# EAGLE board Weight-X - PCB (EAGLE 7.6.0), part 1 of 2
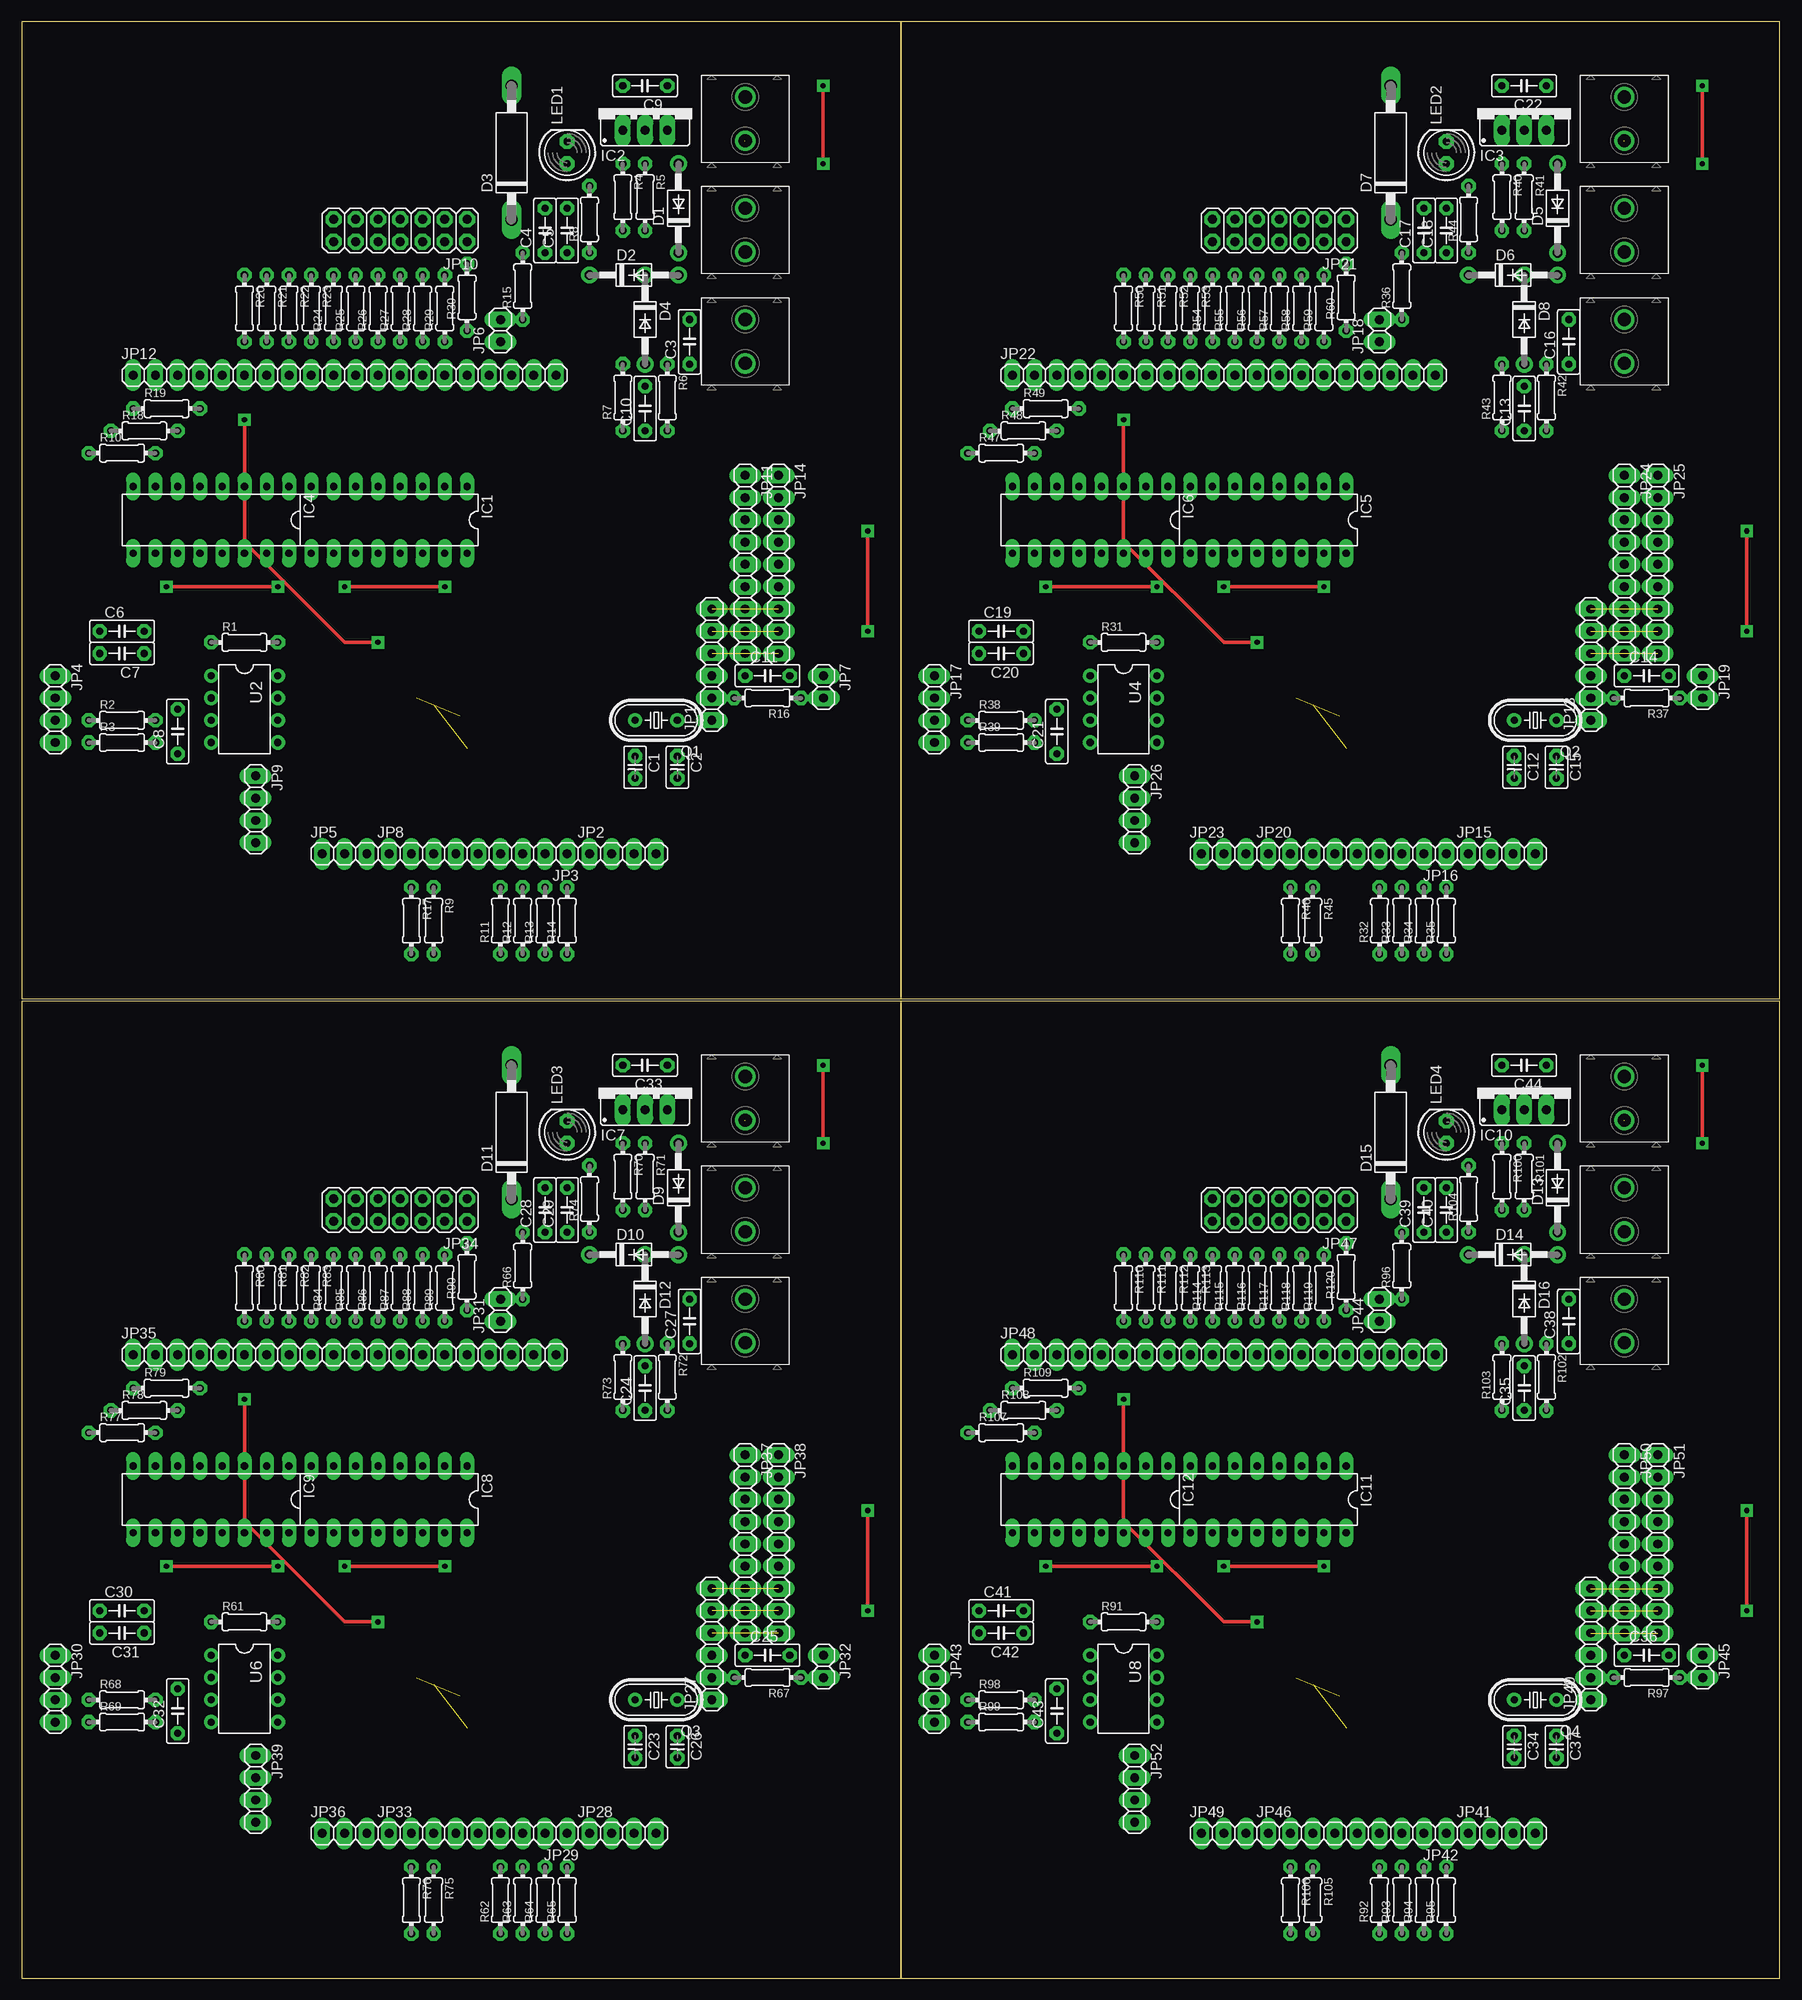
[diagram p0: board, top side]
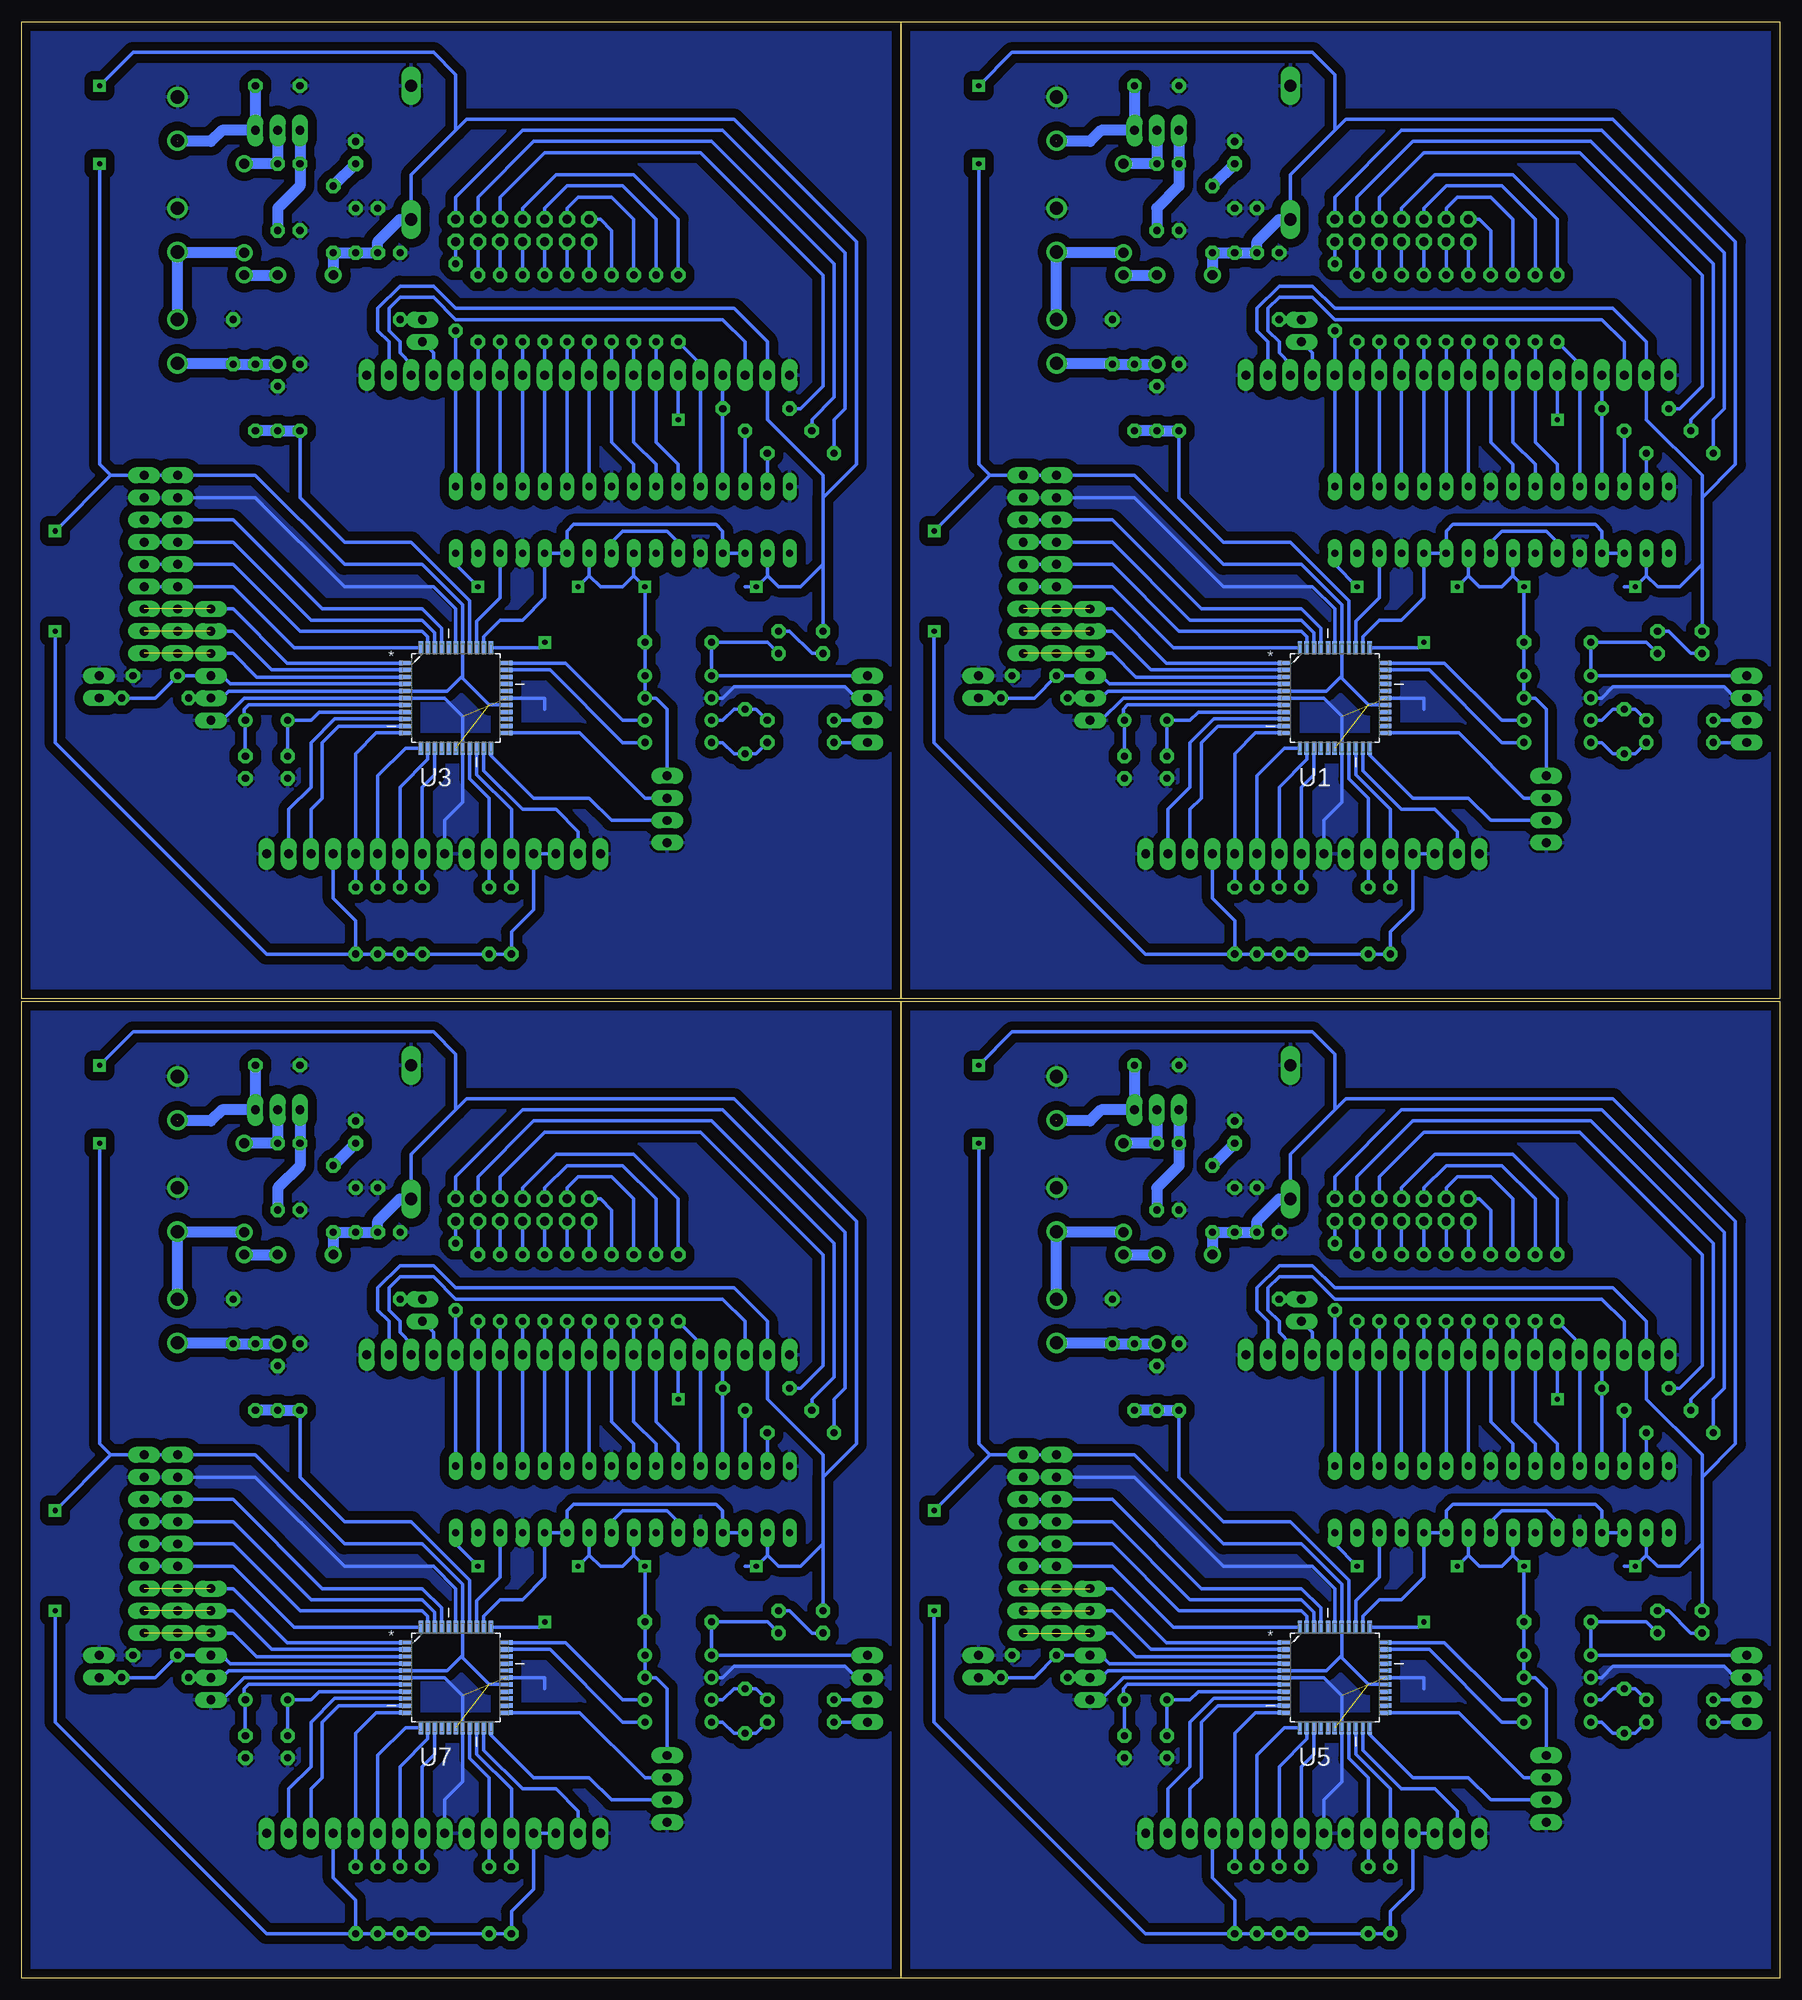
[diagram p1: board, bottom side, seen from below]

Size 200.64 x 223.19 mm. Coordinates in mm from the lower left corner, seen from the top.
Outline: 0,111.76 100.31,111.76 100.31,223.19 0,223.19 0,111.76
Outline: 100.33,111.76 200.64,111.76 200.64,223.19 100.33,223.19 100.33,111.76
Outline: 0,0 100.31,0 100.31,111.43 0,111.43 0,0
Outline: 100.33,0 200.64,0 200.64,111.43 100.33,111.43 100.33,0
Copper layers (1*16): Top 0.035mm / dielectric 1.5mm / Bottom 0.035mm
Design rules "default *": minimum track width 10mil, minimum drill 24mil, track to track 8mil, track to pad 8mil, pad to pad 8mil, via to via 8mil, smd to smd 8mil, copper to edge 40mil, drill to drill 8mil, minimum pad ring 16mil, minimum via ring 16mil, stop-mask expansion 4mil, vias tented up to drill 0mil, thermal gap 10mil
Net classes: 0 GND: clearance 1 mm

## Footprints (pad centres in the part's own frame; a part is rotated, then mirrored left to right if it is on the bottom)
EK500V-02P = drill 1.5: P$1 0,0; P$2 5,0
C2.5-2 = drill 0.813 pad 1.6 octagon: 1 -1.27,0; 2 1.27,0
C5B2.5 = drill 0.813 pad 1.6 octagon: 1 -2.54,0; 2 2.54,0
DO41-10 = drill 1.118 pad 1.93: A 5.08,0; C -5.08,0
DO41-10' = drill 1.118: A 5.08,0; C -5.08,0
C1702-15 = drill 1.397 long: A 7.62,0; C -7.62,0
DIL16 = drill 0.813 long: 1 -8.89,-3.81; 2 -6.35,-3.81; 3 -3.81,-3.81; 4 -1.27,-3.81; 5 1.27,-3.81; 6 3.81,-3.81; 7 6.35,-3.81; 8 8.89,-3.81; 9 8.89,3.81; 10 6.35,3.81; 11 3.81,3.81; 12 1.27,3.81; 13 -1.27,3.81; 14 -3.81,3.81; 15 -6.35,3.81; 16 -8.89,3.81
317TS = drill 1.016 long: 1 -2.54,-2.54; 2 0,-2.54; 3 2.54,-2.54
1X06 = drill 1.016 long: 1 -6.35,0; 2 -3.81,0; 3 -1.27,0; 4 1.27,0; 5 3.81,0; 6 6.35,0
1X04 = drill 1.016 long: 1 -3.81,0; 2 -1.27,0; 3 1.27,0; 4 3.81,0
1X05 = drill 1.016 long: 1 -5.08,0; 2 -2.54,0; 3 0,0; 4 2.54,0; 5 5.08,0
1X03 = drill 1.016 long: 1 -2.54,0; 2 0,0; 3 2.54,0
1X02 = drill 1.016 long: 1 -1.27,0; 2 1.27,0
2X07 = drill 1.016 octagon: 1 -7.62,-1.27; 2 -7.62,1.27; 3 -5.08,-1.27; 4 -5.08,1.27; 5 -2.54,-1.27; 6 -2.54,1.27; 7 0,-1.27; 8 0,1.27; 9 2.54,-1.27; 10 2.54,1.27; 11 5.08,-1.27; 12 5.08,1.27; 13 7.62,-1.27; 14 7.62,1.27
1X09 = drill 1.016 long: 1 -10.16,0; 2 -7.62,0; 3 -5.08,0; 4 -2.54,0; 5 0,0; 6 2.54,0; 7 5.08,0; 8 7.62,0; 9 10.16,0
1X20 = drill 1.016 long: 1 -24.13,0; 2 -21.59,0; 3 -19.05,0; 4 -16.51,0; 5 -13.97,0; 6 -11.43,0; 7 -8.89,0; 8 -6.35,0; 9 -3.81,0; 10 -1.27,0; 11 1.27,0; 12 3.81,0; 13 6.35,0; 14 8.89,0; 15 11.43,0; 16 13.97,0; 17 16.51,0; 18 19.05,0; 19 21.59,0; 20 24.13,0
LED5MM = drill 0.813 pad 1.676 octagon: A -1.27,0; K 1.27,0
HC49U-V = drill 0.813: 1 -2.413,0; 2 2.413,0
0204/7 = drill 0.813 octagon: 1 -3.81,0; 2 3.81,0
QFP80P1200X1200X120-44N = smd 1.473 x 0.508: 1 -5.74,3.988; 2 -5.74,3.2; 3 -5.74,2.388; 4 -5.74,1.6; 5 -5.74,0.787; 6 -5.74,0; 7 -5.74,-0.787; 8 -5.74,-1.6; 9 -5.74,-2.388; 10 -5.74,-3.2; 11 -5.74,-3.988; 23 5.74,-3.988; 24 5.74,-3.2; 25 5.74,-2.388; 26 5.74,-1.6; 27 5.74,-0.787; 28 5.74,0; 29 5.74,0.787; 30 5.74,1.6; 31 5.74,2.388; 32 5.74,3.2; 33 5.74,3.988 | smd 0.508 x 1.473: 12 -3.988,-5.74; 13 -3.2,-5.74; 14 -2.388,-5.74; 15 -1.6,-5.74; 16 -0.787,-5.74; 17 0,-5.74; 18 0.787,-5.74; 19 1.6,-5.74; 20 2.388,-5.74; 21 3.2,-5.74; 22 3.988,-5.74; 34 3.988,5.74; 35 3.2,5.74; 36 2.388,5.74; 37 1.6,5.74; 38 0.787,5.74; 39 0,5.74; 40 -0.787,5.74; 41 -1.6,5.74; 42 -2.388,5.74; 43 -3.2,5.74; 44 -3.988,5.74
PDIP08_300MIL = drill 0.813: AGND -1.27,-3.81; AVDD -3.81,3.81; DOUT 1.27,3.81; DVDD -1.27,3.81; INN 1.27,-3.81; INP 3.81,-3.81; PD_SCK 3.81,3.81; VREF -3.81,-3.81

## Placement (x,y rotation side)
BATTERY  ST02-5MM  [EK500V-02P]  82.55,201.93 270 top
BATTERY1  ST02-5MM  [EK500V-02P]  182.88,201.93 270 top
BATTERY2  ST02-5MM  [EK500V-02P]  82.55,90.17 270 top
BATTERY3  ST02-5MM  [EK500V-02P]  182.88,90.17 270 top
C1  22pF  [C2.5-2]  69.98,138.15 270 top
C2  22pF  [C2.5-2]  74.8,138.15 270 top
C3  0.1uF  [C5B2.5]  76.2,186.69 90 top
C4  1uF  [C5B2.5]  59.69,199.39 90 top
C5  0.1uF  [C5B2.5]  62.23,199.39 90 top
C6  1uF  [C5B2.5]  11.43,153.67 0 top
C7  0.1uF  [C5B2.5]  11.43,151.13 180 top
C8  0.1uF  [C5B2.5]  17.78,142.24 90 top
C9  0.1uF  [C5B2.5]  71.12,215.9 180 top
C10  1uF  [C5B2.5]  71.12,179.07 90 top
C11  0.1uF  [C5B2.5]  85.09,148.59 0 top
C12  22pF  [C2.5-2]  170.31,138.15 270 top
C13  1uF  [C5B2.5]  171.45,179.07 90 top
C14  0.1uF  [C5B2.5]  185.42,148.59 0 top
C15  22pF  [C2.5-2]  175.13,138.15 270 top
C16  0.1uF  [C5B2.5]  176.53,186.69 90 top
C17  1uF  [C5B2.5]  160.02,199.39 90 top
C18  0.1uF  [C5B2.5]  162.56,199.39 90 top
C19  1uF  [C5B2.5]  111.76,153.67 0 top
C20  0.1uF  [C5B2.5]  111.76,151.13 180 top
C21  0.1uF  [C5B2.5]  118.11,142.24 90 top
C22  0.1uF  [C5B2.5]  171.45,215.9 180 top
C23  22pF  [C2.5-2]  69.98,26.39 270 top
C24  1uF  [C5B2.5]  71.12,67.31 90 top
C25  0.1uF  [C5B2.5]  85.09,36.83 0 top
C26  22pF  [C2.5-2]  74.8,26.39 270 top
C27  0.1uF  [C5B2.5]  76.2,74.93 90 top
C28  1uF  [C5B2.5]  59.69,87.63 90 top
C29  0.1uF  [C5B2.5]  62.23,87.63 90 top
C30  1uF  [C5B2.5]  11.43,41.91 0 top
C31  0.1uF  [C5B2.5]  11.43,39.37 180 top
C32  0.1uF  [C5B2.5]  17.78,30.48 90 top
C33  0.1uF  [C5B2.5]  71.12,104.14 180 top
C34  22pF  [C2.5-2]  170.31,26.39 270 top
C35  1uF  [C5B2.5]  171.45,67.31 90 top
C36  0.1uF  [C5B2.5]  185.42,36.83 0 top
C37  22pF  [C2.5-2]  175.13,26.39 270 top
C38  0.1uF  [C5B2.5]  176.53,74.93 90 top
C39  1uF  [C5B2.5]  160.02,87.63 90 top
C40  0.1uF  [C5B2.5]  162.56,87.63 90 top
C41  1uF  [C5B2.5]  111.76,41.91 0 top
C42  0.1uF  [C5B2.5]  111.76,39.37 180 top
C43  0.1uF  [C5B2.5]  118.11,30.48 90 top
C44  0.1uF  [C5B2.5]  171.45,104.14 180 top
D1  1N4004  [DO41-10]  74.93,201.93 90 top
D2  1N4004  [DO41-10']  69.85,194.31 0 top
D3  [C1702-15]  55.88,208.28 90 top
D4  1N4004  [DO41-10']  71.12,189.23 270 top
D5  1N4004  [DO41-10]  175.26,201.93 90 top
D6  1N4004  [DO41-10']  170.18,194.31 0 top
D7  [C1702-15]  156.21,208.28 90 top
D8  1N4004  [DO41-10']  171.45,189.23 270 top
D9  1N4004  [DO41-10]  74.93,90.17 90 top
D10  1N4004  [DO41-10']  69.85,82.55 0 top
D11  [C1702-15]  55.88,96.52 90 top
D12  1N4004  [DO41-10']  71.12,77.47 270 top
D13  1N4004  [DO41-10]  175.26,90.17 90 top
D14  1N4004  [DO41-10']  170.18,82.55 0 top
D15  [C1702-15]  156.21,96.52 90 top
D16  1N4004  [DO41-10']  171.45,77.47 270 top
IC1  74LS595N  [DIL16]  41.91,166.37 180 top
IC2  [317TS]  71.12,213.36 0 top
IC3  [317TS]  171.45,213.36 0 top
IC4  74LS595N  [DIL16]  21.59,166.37 180 top
IC5  74LS595N  [DIL16]  142.24,166.37 180 top
IC6  74LS595N  [DIL16]  121.92,166.37 180 top
IC7  [317TS]  71.12,101.6 0 top
IC8  74LS595N  [DIL16]  41.91,54.61 180 top
IC9  74LS595N  [DIL16]  21.59,54.61 180 top
IC10  [317TS]  171.45,101.6 0 top
IC11  74LS595N  [DIL16]  142.24,54.61 180 top
IC12  74LS595N  [DIL16]  121.92,54.61 180 top
JP1  [1X06]  78.74,149.86 90 top
JP2  [1X04]  68.58,128.27 0 top
JP3  [1X05]  57.15,128.27 180 top
JP4  [1X04]  3.81,144.78 270 top
JP5  [1X03]  36.83,128.27 0 top
JP6  [1X02]  54.61,187.96 90 top
JP7  [1X02]  91.49,147.32 270 top
JP8  [1X04]  45.72,128.27 0 top
JP9  [1X04]  26.67,133.35 270 top
JP10  [2X07]  43.18,199.39 180 top
JP11  [1X09]  82.55,161.29 270 top
JP12  [1X20]  36.83,182.88 0 top
JP13  [1X06]  179.07,149.86 90 top
JP14  [1X09]  86.36,161.29 270 top
JP15  [1X04]  168.91,128.27 0 top
JP16  [1X05]  157.48,128.27 180 top
JP17  [1X04]  104.14,144.78 270 top
JP18  [1X02]  154.94,187.96 90 top
JP19  [1X02]  191.82,147.32 270 top
JP20  [1X04]  146.05,128.27 0 top
JP21  [2X07]  143.51,199.39 180 top
JP22  [1X20]  137.16,182.88 0 top
JP23  [1X03]  137.16,128.27 0 top
JP24  [1X09]  182.88,161.29 270 top
JP25  [1X09]  186.69,161.29 270 top
JP26  [1X04]  127,133.35 270 top
JP27  [1X06]  78.74,38.1 90 top
JP28  [1X04]  68.58,16.51 0 top
JP29  [1X05]  57.15,16.51 180 top
JP30  [1X04]  3.81,33.02 270 top
JP31  [1X02]  54.61,76.2 90 top
JP32  [1X02]  91.49,35.56 270 top
JP33  [1X04]  45.72,16.51 0 top
JP34  [2X07]  43.18,87.63 180 top
JP35  [1X20]  36.83,71.12 0 top
JP36  [1X03]  36.83,16.51 0 top
JP37  [1X09]  82.55,49.53 270 top
JP38  [1X09]  86.36,49.53 270 top
JP39  [1X04]  26.67,21.59 270 top
JP40  [1X06]  179.07,38.1 90 top
JP41  [1X04]  168.91,16.51 0 top
JP42  [1X05]  157.48,16.51 180 top
JP43  [1X04]  104.14,33.02 270 top
JP44  [1X02]  154.94,76.2 90 top
JP45  [1X02]  191.82,35.56 270 top
JP46  [1X04]  146.05,16.51 0 top
JP47  [2X07]  143.51,87.63 180 top
JP48  [1X20]  137.16,71.12 0 top
JP49  [1X03]  137.16,16.51 0 top
JP50  [1X09]  182.88,49.53 270 top
JP51  [1X09]  186.69,49.53 270 top
JP52  [1X04]  127,21.59 270 top
LED1  [LED5MM]  62.23,208.28 90 top
LED2  [LED5MM]  162.56,208.28 90 top
LED3  [LED5MM]  62.23,96.52 90 top
LED4  [LED5MM]  162.56,96.52 90 top
Q1  [HC49U-V]  72.39,143.51 180 top
Q2  [HC49U-V]  172.72,143.51 180 top
Q3  [HC49U-V]  72.39,31.75 180 top
Q4  [HC49U-V]  172.72,31.75 180 top
R1  220Ohms  [0204/7]  25.4,152.4 0 top
R2  220Ohms  [0204/7]  11.43,143.51 0 top
R3  220Ohms  [0204/7]  11.43,140.97 0 top
R4  1k  [0204/7]  68.58,203.2 270 top
R5  220Ohms  [0204/7]  71.12,203.2 270 top
R6  1M  [0204/7]  73.66,180.34 270 top
R7  100k  [0204/7]  68.58,180.34 90 top
R8  10k  [0204/7]  64.77,200.66 90 top
R9  4.7k  [0204/7]  46.99,120.65 270 top
R10  4.7k  [0204/7]  11.43,173.99 0 top
R11  10k  [0204/7]  54.61,120.65 90 top
R12  10k  [0204/7]  57.15,120.65 90 top
R13  10k  [0204/7]  59.69,120.65 90 top
R14  10k  [0204/7]  62.23,120.65 90 top
R15  4.7k  [0204/7]  57.15,193.04 90 top
R16  4.7k  [0204/7]  85.09,146.05 180 top
R17  4.7k  [0204/7]  44.45,120.65 270 top
R18  4.7k  [0204/7]  13.97,176.53 0 top
R19  4.7k  [0204/7]  16.51,179.07 0 top
R20  4.7k  [0204/7]  25.4,190.5 270 top
R21  4.7k  [0204/7]  27.94,190.5 270 top
R22  4.7k  [0204/7]  30.48,190.5 270 top
R23  4.7k  [0204/7]  33.02,190.5 270 top
R24  4.7k  [0204/7]  35.56,190.5 90 top
R25  4.7k  [0204/7]  38.1,190.5 90 top
R26  4.7k  [0204/7]  40.64,190.5 90 top
R27  4.7k  [0204/7]  43.18,190.5 90 top
R28  4.7k  [0204/7]  45.72,190.5 90 top
R29  4.7k  [0204/7]  48.26,190.5 90 top
R30  4.7k  [0204/7]  50.8,191.77 90 top
R31  220Ohms  [0204/7]  125.73,152.4 0 top
R32  10k  [0204/7]  154.94,120.65 90 top
R33  10k  [0204/7]  157.48,120.65 90 top
R34  10k  [0204/7]  160.02,120.65 90 top
R35  10k  [0204/7]  162.56,120.65 90 top
R36  4.7k  [0204/7]  157.48,193.04 90 top
R37  4.7k  [0204/7]  185.42,146.05 180 top
R38  220Ohms  [0204/7]  111.76,143.51 0 top
R39  220Ohms  [0204/7]  111.76,140.97 0 top
R40  1k  [0204/7]  168.91,203.2 270 top
R41  220Ohms  [0204/7]  171.45,203.2 270 top
R42  1M  [0204/7]  173.99,180.34 270 top
R43  100k  [0204/7]  168.91,180.34 90 top
R44  10k  [0204/7]  165.1,200.66 90 top
R45  4.7k  [0204/7]  147.32,120.65 270 top
R46  4.7k  [0204/7]  144.78,120.65 270 top
R47  4.7k  [0204/7]  111.76,173.99 0 top
R48  4.7k  [0204/7]  114.3,176.53 0 top
R49  4.7k  [0204/7]  116.84,179.07 0 top
R50  4.7k  [0204/7]  125.73,190.5 270 top
R51  4.7k  [0204/7]  128.27,190.5 270 top
R52  4.7k  [0204/7]  130.81,190.5 270 top
R53  4.7k  [0204/7]  133.35,190.5 270 top
R54  4.7k  [0204/7]  135.89,190.5 90 top
R55  4.7k  [0204/7]  138.43,190.5 90 top
R56  4.7k  [0204/7]  140.97,190.5 90 top
R57  4.7k  [0204/7]  143.51,190.5 90 top
R58  4.7k  [0204/7]  146.05,190.5 90 top
R59  4.7k  [0204/7]  148.59,190.5 90 top
R60  4.7k  [0204/7]  151.13,191.77 90 top
R61  220Ohms  [0204/7]  25.4,40.64 0 top
R62  10k  [0204/7]  54.61,8.89 90 top
R63  10k  [0204/7]  57.15,8.89 90 top
R64  10k  [0204/7]  59.69,8.89 90 top
R65  10k  [0204/7]  62.23,8.89 90 top
R66  4.7k  [0204/7]  57.15,81.28 90 top
R67  4.7k  [0204/7]  85.09,34.29 180 top
R68  220Ohms  [0204/7]  11.43,31.75 0 top
R69  220Ohms  [0204/7]  11.43,29.21 0 top
R70  1k  [0204/7]  68.58,91.44 270 top
R71  220Ohms  [0204/7]  71.12,91.44 270 top
R72  1M  [0204/7]  73.66,68.58 270 top
R73  100k  [0204/7]  68.58,68.58 90 top
R74  10k  [0204/7]  64.77,88.9 90 top
R75  4.7k  [0204/7]  46.99,8.89 270 top
R76  4.7k  [0204/7]  44.45,8.89 270 top
R77  4.7k  [0204/7]  11.43,62.23 0 top
R78  4.7k  [0204/7]  13.97,64.77 0 top
R79  4.7k  [0204/7]  16.51,67.31 0 top
R80  4.7k  [0204/7]  25.4,78.74 270 top
R81  4.7k  [0204/7]  27.94,78.74 270 top
R82  4.7k  [0204/7]  30.48,78.74 270 top
R83  4.7k  [0204/7]  33.02,78.74 270 top
R84  4.7k  [0204/7]  35.56,78.74 90 top
R85  4.7k  [0204/7]  38.1,78.74 90 top
R86  4.7k  [0204/7]  40.64,78.74 90 top
R87  4.7k  [0204/7]  43.18,78.74 90 top
R88  4.7k  [0204/7]  45.72,78.74 90 top
R89  4.7k  [0204/7]  48.26,78.74 90 top
R90  4.7k  [0204/7]  50.8,80.01 90 top
R91  220Ohms  [0204/7]  125.73,40.64 0 top
R92  10k  [0204/7]  154.94,8.89 90 top
R93  10k  [0204/7]  157.48,8.89 90 top
R94  10k  [0204/7]  160.02,8.89 90 top
R95  10k  [0204/7]  162.56,8.89 90 top
R96  4.7k  [0204/7]  157.48,81.28 90 top
R97  4.7k  [0204/7]  185.42,34.29 180 top
R98  220Ohms  [0204/7]  111.76,31.75 0 top
R99  220Ohms  [0204/7]  111.76,29.21 0 top
R100  1k  [0204/7]  168.91,91.44 270 top
R101  220Ohms  [0204/7]  171.45,91.44 270 top
R102  1M  [0204/7]  173.99,68.58 270 top
R103  100k  [0204/7]  168.91,68.58 90 top
R104  10k  [0204/7]  165.1,88.9 90 top
R105  4.7k  [0204/7]  147.32,8.89 270 top
R106  4.7k  [0204/7]  144.78,8.89 270 top
R107  4.7k  [0204/7]  111.76,62.23 0 top
R108  4.7k  [0204/7]  114.3,64.77 0 top
R109  4.7k  [0204/7]  116.84,67.31 0 top
R110  4.7k  [0204/7]  125.73,78.74 270 top
R111  4.7k  [0204/7]  128.27,78.74 270 top
R112  4.7k  [0204/7]  130.81,78.74 270 top
R113  4.7k  [0204/7]  133.35,78.74 270 top
R114  4.7k  [0204/7]  135.89,78.74 90 top
R115  4.7k  [0204/7]  138.43,78.74 90 top
R116  4.7k  [0204/7]  140.97,78.74 90 top
R117  4.7k  [0204/7]  143.51,78.74 90 top
R118  4.7k  [0204/7]  146.05,78.74 90 top
R119  4.7k  [0204/7]  148.59,78.74 90 top
R120  4.7k  [0204/7]  151.13,80.01 90 top
SMPS  ST02-5MM  [EK500V-02P]  82.55,214.63 270 top
SMPS1  ST02-5MM  [EK500V-02P]  182.88,214.63 270 top
SMPS2  ST02-5MM  [EK500V-02P]  82.55,102.87 270 top
SMPS3  ST02-5MM  [EK500V-02P]  182.88,102.87 270 top
SWITCH1  ST02-5MM  [EK500V-02P]  82.55,189.23 270 top
SWITCH2  ST02-5MM  [EK500V-02P]  182.88,189.23 270 top
SWITCH3  ST02-5MM  [EK500V-02P]  82.55,77.47 270 top
SWITCH4  ST02-5MM  [EK500V-02P]  182.88,77.47 270 top
U1  ATMEGA16A-AU  [QFP80P1200X1200X120-44N]  50.8,146.05 0 bottom
U2  HX710-P  [PDIP08_300MIL]  25.4,144.78 270 top
U3  ATMEGA16A-AU  [QFP80P1200X1200X120-44N]  151.13,146.05 0 bottom
U4  HX710-P  [PDIP08_300MIL]  125.73,144.78 270 top
U5  ATMEGA16A-AU  [QFP80P1200X1200X120-44N]  50.8,34.29 0 bottom
U6  HX710-P  [PDIP08_300MIL]  25.4,33.02 270 top
U7  ATMEGA16A-AU  [QFP80P1200X1200X120-44N]  151.13,34.29 0 bottom
U8  HX710-P  [PDIP08_300MIL]  125.73,33.02 270 top

## Library data of the parts
BATTERY BATTERY1-BATTERY3 SMPS SMPS1-SMPS3 SWITCH1-SWITCH4 = con-dinkle
C1-C44 = capacitor-wima
D1 D5 D9 D13 LED1-LED4 = adafruit
D2-D4 D6-D8 D10-D12 D14-D16 = diode
IC1 IC4-IC6 IC8 IC9 IC11 IC12 = 74xx-us
IC2 IC3 IC7 IC10 = v-reg
JP1-JP52 = pinhead
Q1-Q4 = adafruit; OC_FARNELL: 1666969; OC_NEWARK: unknown
R1-R120 = eagle-ltspice; SPICEMODEL: NONE; SPICEPREFIX: R
U1 U3 U5 U7 = Atmel_By_element14_Batch_1-00; MPN: ATMEGA16A-AU; OC_FARNELL: 1704560; OC_NEWARK: 08R5490; PACKAGE: TQFP-44; SUPPLIER: Atmel
U2 U4 U6 U8 = hx710

## Nets
1_DIGIT_ACT: JP10.1 R10.1
1_DIGIT_ACT1: JP21.1 R47.1
1_DIGIT_ACT2: JP34.1 R77.1
1_DIGIT_ACT3: JP47.1 R107.1
2_DIGIT_ACT: JP10.2 R30.2
2_DIGIT_ACT1: JP21.2 R60.2
2_DIGIT_ACT2: JP34.2 R90.2
2_DIGIT_ACT3: JP47.2 R120.2
3_DIGIT_ACT: JP10.3 R18.1
3_DIGIT_ACT1: JP21.3 R48.1
3_DIGIT_ACT2: JP34.3 R78.1
3_DIGIT_ACT3: JP47.3 R108.1
4_DIGIT_ACT: JP10.4 R29.2
4_DIGIT_ACT1: JP21.4 R59.2
4_DIGIT_ACT2: JP34.4 R89.2
4_DIGIT_ACT3: JP47.4 R119.2
5_DIGIT_ACT: JP10.5 R19.1
5_DIGIT_ACT1: JP21.5 R49.1
5_DIGIT_ACT2: JP34.5 R79.1
5_DIGIT_ACT3: JP47.5 R109.1
6_DIGIT_ACT: JP10.6 R28.2
6_DIGIT_ACT1: JP21.6 R58.2
6_DIGIT_ACT2: JP34.6 R88.2
6_DIGIT_ACT3: JP47.6 R118.2
A: JP10.14 R24.2
A1: JP21.14 R54.2
A2: JP34.14 R84.2
A3: JP47.14 R114.2
ACTIVATOR: JP5.2 U1.21
ACTIVATOR1: JP23.2 U3.21
ACTIVATOR2: JP36.2 U5.21
ACTIVATOR3: JP49.2 U7.21
AREF: U1.29
AREF1: U3.29
AREF2: U5.29
AREF3: U7.29
B: JP10.13 R23.1
B1: JP21.13 R53.1
B2: JP34.13 R83.1
B3: JP47.13 R113.1
BATTERY_VOLTAGE: C10.1 R6.2 R7.1 U1.37
BATTERY_VOLTAGE1: C13.1 R42.2 R43.1 U3.37
BATTERY_VOLTAGE2: C24.1 R72.2 R73.1 U5.37
BATTERY_VOLTAGE3: C35.1 R102.2 R103.1 U7.37
BUTTON1: JP16.3 R33.2 U3.13
BUTTON2: JP16.4 R32.2 U3.14
BUTTON3: JP3.3 R12.2 U1.13
BUTTON4: JP3.4 R11.2 U1.14
BUTTON5: JP29.3 R63.2 U5.13
BUTTON6: JP29.4 R62.2 U5.14
BUTTON7: JP42.3 R93.2 U7.13
BUTTON8: JP42.4 R92.2 U7.14
C: JP10.12 R25.2
C1: JP21.12 R55.2
C2: JP34.12 R85.2
C3: JP47.12 R115.2
C/D: IC4.5 JP12.4 R19.2
C/D1: IC6.5 JP22.4 R49.2
C/D2: IC9.5 JP35.4 R79.2
C/D3: IC12.5 JP48.4 R109.2
CE_MEMORY: JP11.3 JP14.3 U1.41
CE_MEMORY1: JP24.3 JP25.3 U3.41
CE_MEMORY2: JP37.3 JP38.3 U5.41
CE_MEMORY3: JP50.3 JP51.3 U7.41
CE_NRF: JP11.5 JP14.5 U1.43
CE_NRF1: JP24.5 JP25.5 U3.43
CE_NRF2: JP37.5 JP38.5 U5.43
CE_NRF3: JP50.5 JP51.5 U7.43
CLOCK_DISPLAY: IC1.11 IC1.12 IC4.11 IC4.12 U1.35
CLOCK_DISPLAY1: IC5.11 IC5.12 IC6.11 IC6.12 U3.35
CLOCK_DISPLAY2: IC8.11 IC8.12 IC9.11 IC9.12 U5.35
CLOCK_DISPLAY3: IC11.11 IC11.12 IC12.11 IC12.12 U7.35
CS1: IC1.2 JP12.15 R29.1
CS2: IC1.1 JP12.16 R30.1
CS3: IC5.2 JP22.15 R59.1
CS4: IC5.1 JP22.16 R60.1
CS5: IC8.2 JP35.15 R89.1
CS6: IC8.1 JP35.16 R90.1
CS7: IC11.2 JP48.15 R119.1
CS8: IC11.1 JP48.16 R120.1
CSN_NRF: JP11.6 JP14.6 U1.44
CSN_NRF1: JP24.6 JP25.6 U3.44
CSN_NRF2: JP37.6 JP38.6 U5.44
CSN_NRF3: JP50.6 JP51.6 U7.44
D: JP10.11 R22.1
D1: JP21.11 R52.1
D2: JP34.11 R82.1
D3: JP47.11 R112.1
DATA_DISPLAY: IC1.14 U1.36
DATA_DISPLAY1: IC5.14 U3.36
DATA_DISPLAY2: IC8.14 U5.36
DATA_DISPLAY3: IC11.14 U7.36
DB0: IC4.3 JP12.7 R21.2
DB1: IC4.2 JP12.8 R22.2
DB2: IC4.1 JP12.9 R23.2
DB3: IC1.7 JP12.10 R24.1
DB4: IC1.6 JP12.11 R25.1
DB5: IC1.5 JP12.12 R26.1
DB6: IC1.4 JP12.13 R27.1
DB7: IC1.3 JP12.14 R28.1
DB8: IC6.3 JP22.7 R51.2
DB9: IC6.2 JP22.8 R52.2
DB10: IC6.1 JP22.9 R53.2
DB11: IC5.7 JP22.10 R54.1
DB12: IC5.6 JP22.11 R55.1
DB13: IC5.5 JP22.12 R56.1
DB14: IC5.4 JP22.13 R57.1
DB15: IC5.3 JP22.14 R58.1
DB16: IC9.3 JP35.7 R81.2
DB17: IC9.2 JP35.8 R82.2
DB18: IC9.1 JP35.9 R83.2
DB19: IC8.7 JP35.10 R84.1
DB20: IC8.6 JP35.11 R85.1
DB21: IC8.5 JP35.12 R86.1
DB22: IC8.4 JP35.13 R87.1
DB23: IC8.3 JP35.14 R88.1
DB24: IC12.3 JP48.7 R111.2
DB25: IC12.2 JP48.8 R112.2
DB26: IC12.1 JP48.9 R113.2
DB27: IC11.7 JP48.10 R114.1
DB28: IC11.6 JP48.11 R115.1
DB29: IC11.5 JP48.12 R116.1
DB30: IC11.4 JP48.13 R117.1
DB31: IC11.3 JP48.14 R118.1
DOUT: U1.33 U2.DOUT
DOUT1: JP9.3 U1.22
DOUT2: U3.33 U4.DOUT
DOUT3: JP26.3 U3.22
DOUT4: U5.33 U6.DOUT
DOUT5: JP39.3 U5.22
DOUT6: U7.33 U8.DOUT
DOUT7: JP52.3 U7.22
DP: JP10.7 R20.1
DP1: JP21.7 R50.1
DP2: JP34.7 R80.1
DP3: JP47.7 R110.1
E: JP12.6 U1.34
E1: JP22.6 U3.34
E2: JP35.6 U5.34
E3: JP48.6 U7.34
E_LED: JP10.10 R26.2
E_LED1: JP21.10 R56.2
E_LED2: JP34.10 R86.2
E_LED3: JP47.10 R116.2
F: JP10.9 R21.1
F1: JP21.9 R51.1
F2: JP34.9 R81.1
F3: JP47.9 R111.1
G: JP10.8 R27.2
G1: JP21.8 R57.2
G2: JP34.8 R87.2
G3: JP47.8 R117.2
GND: BATTERY.P$1 C1.2 C2.2 C3.2 C4.2 C5.2 C9.2 C10.2 C11.2 D3.A IC1.8 IC1.13 IC4.8 IC4.13 JP1.1 JP2.4 JP3.5 JP4.2 JP5.1 JP7.1 JP8.4 JP9.4 JP11.2 JP12.1 JP12.20 JP14.2 LED1.K R4.2 R7.2 R15.2 SMPS.P$1 U1.6 U1.18 U1.28 U1.39 U2.AGND
GND1: BATTERY1.P$1 C12.2 C13.2 C14.2 C15.2 C16.2 C17.2 C18.2 C22.2 D7.A IC5.8 IC5.13 IC6.8 IC6.13 JP13.1 JP15.4 JP16.5 JP17.2 JP19.1 JP20.4 JP22.1 JP22.20 JP23.1 JP24.2 JP25.2 JP26.4 LED2.K R36.2 R40.2 R43.2 SMPS1.P$1 U3.6 U3.18 U3.28 U3.39 U4.AGND
GND2: BATTERY2.P$1 C23.2 C24.2 C25.2 C26.2 C27.2 C28.2 C29.2 C33.2 D11.A IC8.8 IC8.13 IC9.8 IC9.13 JP27.1 JP28.4 JP29.5 JP30.2 JP32.1 JP33.4 JP35.1 JP35.20 JP36.1 JP37.2 JP38.2 JP39.4 LED3.K R66.2 R70.2 R73.2 SMPS2.P$1 U5.6 U5.18 U5.28 U5.39 U6.AGND
GND3: BATTERY3.P$1 C34.2 C35.2 C36.2 C37.2 C38.2 C39.2 C40.2 C44.2 D15.A IC11.8 IC11.13 IC12.8 IC12.13 JP40.1 JP41.4 JP42.5 JP43.2 JP45.1 JP46.4 JP48.1 JP48.20 JP49.1 JP50.2 JP51.2 JP52.4 LED4.K R96.2 R100.2 R103.2 SMPS3.P$1 U7.6 U7.18 U7.28 U7.39 U8.AGND
INN: C8.2 R2.2 U2.INN
INN1: C21.2 R38.2 U4.INN
INN2: C32.2 R68.2 U6.INN
INN3: C43.2 R98.2 U8.INN
INP: C8.1 R3.2 U2.INP
INP1: C21.1 R39.2 U4.INP
INP2: C32.1 R69.2 U6.INP
INP3: C43.1 R99.2 U8.INP
INT0: JP3.1 R14.2 U1.11
INT1: JP3.2 R13.2 U1.12
INT2: JP11.4 JP14.4 U1.42
INT3: JP16.1 R35.2 U3.11
INT4: JP16.2 R34.2 U3.12
INT5: JP24.4 JP25.4 U3.42
INT6: JP29.1 R65.2 U5.11
INT7: JP29.2 R64.2 U5.12
INT8: JP37.4 JP38.4 U5.42
INT9: JP42.1 R95.2 U7.11
INT10: JP42.2 R94.2 U7.12
INT11: JP50.4 JP51.4 U7.42
MISO: JP1.5 JP11.8 JP14.8 U1.2
MISO1: JP13.5 JP24.8 JP25.8 U3.2
MISO2: JP27.5 JP37.8 JP38.8 U5.2
MISO3: JP40.5 JP50.8 JP51.8 U7.2
MOSI: JP1.6 JP11.7 JP14.7 U1.1
MOSI1: JP13.6 JP24.7 JP25.7 U3.1
MOSI2: JP27.6 JP37.7 JP38.7 U5.1
MOSI3: JP40.6 JP50.7 JP51.7 U7.1
N$1: BATTERY.P$2 D1.C SWITCH1.P$1
N$2: IC2.1 R4.1 R5.2
N$3: LED1.A R8.2
N$4: D1.A IC2.2 R5.1
N$5: JP4.3 R2.1
N$6: D2.A D4.C
N$7: C9.1 IC2.3 SMPS.P$2
N$8: C19.2 C20.2
N$9: C6.2 C7.2
N$10: C3.1 D4.A R6.1 SWITCH1.P$2
N$11: JP4.4 R3.1
N$12: JP17.3 R38.1
N$13: JP6.2 R15.1
N$14: JP17.4 R39.1
N$15: IC1.9 IC4.14
N$16: IC1.15
N$17: IC3.1 R40.1 R41.2
N$18: D5.A IC3.2 R41.1
N$19: C22.1 IC3.3 SMPS1.P$2
N$20: U1.24
N$21: U1.25
N$22: U1.26
N$23: C16.1 D8.A R42.1 SWITCH2.P$2
N$24: IC4.15
N$25: JP18.2 R36.1
N$26: BATTERY1.P$2 D5.C SWITCH2.P$1
N$27: LED2.A R44.2
N$28: D6.A D8.C
N$29: IC5.9 IC6.14
N$30: IC5.15
N$31: IC6.15
N$32: U3.24
N$33: U3.25
N$34: U3.26
N$35: C30.2 C31.2
N$36: JP30.3 R68.1
N$37: JP30.4 R69.1
N$38: IC7.1 R70.1 R71.2
N$39: D9.A IC7.2 R71.1
N$40: C33.1 IC7.3 SMPS2.P$2
N$41: C27.1 D12.A R72.1 SWITCH3.P$2
N$42: JP31.2 R66.1
N$43: BATTERY2.P$2 D9.C SWITCH3.P$1
N$44: LED3.A R74.2
N$45: D10.A D12.C
N$46: IC8.9 IC9.14
N$47: IC8.15
N$48: IC9.15
N$49: U5.24
N$50: U5.25
N$51: U5.26
N$52: C41.2 C42.2
N$53: JP43.3 R98.1
N$54: JP43.4 R99.1
N$55: IC10.1 R100.1 R101.2
N$56: D13.A IC10.2 R101.1
N$57: C44.1 IC10.3 SMPS3.P$2
N$58: C38.1 D16.A R102.1 SWITCH4.P$2
N$59: JP44.2 R96.1
N$60: BATTERY3.P$2 D13.C SWITCH4.P$1
N$61: LED4.A R104.2
N$62: D14.A D16.C
N$63: IC11.9 IC12.14
N$64: IC11.15
N$65: IC12.15
N$66: U7.24
N$67: U7.25
N$68: U7.26
PD_SCK: U1.32 U2.PD_SCK
PD_SCK1: JP9.2 U1.23
PD_SCK2: U3.32 U4.PD_SCK
PD_SCK3: JP26.2 U3.23
PD_SCK4: U5.32 U6.PD_SCK
PD_SCK5: JP39.2 U5.23
PD_SCK6: U7.32 U8.PD_SCK
PD_SCK7: JP52.2 U7.23
QG: IC4.6 R18.2
QG1: IC6.6 R48.2
QG2: IC9.6 R78.2
QG3: IC12.6 R108.2
QH: IC4.7 R10.2
QH1: IC6.7 R47.2
QH2: IC9.7 R77.2
QH3: IC12.7 R107.2
R/W: IC4.4 JP12.5 R20.2
R/W1: IC6.4 JP22.5 R50.2
R/W2: IC9.4 JP35.5 R80.2
R/W3: IC12.4 JP48.5 R110.2
RES: JP6.1 JP12.17
RES1: JP18.1 JP22.17
RES2: JP31.1 JP35.17
RES3: JP44.1 JP48.17
RESET: C11.1 JP1.3 JP7.2 R16.1 U1.4
RESET1: C14.1 JP13.3 JP19.2 R37.1 U3.4
RESET2: C25.1 JP27.3 JP32.2 R67.1 U5.4
RESET3: C36.1 JP40.3 JP45.2 R97.1 U7.4
RXD: JP2.3 U1.9
RXD1: JP15.3 U3.9
RXD2: JP28.3 U5.9
RXD3: JP41.3 U7.9
SCK: JP1.4 JP11.9 JP14.9 U1.3
SCK1: JP13.4 JP24.9 JP25.9 U3.3
SCK2: JP27.4 JP37.9 JP38.9 U5.3
SCK3: JP40.4 JP50.9 JP51.9 U7.3
SCL: JP8.3 R9.1 U1.19
SCL1: JP20.3 R45.1 U3.19
SCL2: JP33.3 R75.1 U5.19
SCL3: JP46.3 R105.1 U7.19
SDA: JP8.2 R17.1 U1.20
SDA1: JP20.2 R46.1 U3.20
SDA2: JP33.2 R76.1 U5.20
SDA3: JP46.2 R106.1 U7.20
TXD: JP2.2 U1.10
TXD1: JP15.2 U3.10
TXD2: JP28.2 U5.10
TXD3: JP41.2 U7.10
VCC: C4.1 C5.1 C6.1 D2.C D3.C IC1.10 IC1.16 IC4.10 IC4.16 JP1.2 JP2.1 JP5.3 JP8.1 JP9.1 JP11.1 JP12.2 JP12.19 JP14.1 R1.2 R8.1 R9.2 R11.1 R12.1 R13.1 R14.1 R16.2 R17.2 U1.5 U1.17 U1.27 U1.38 U2.AVDD U2.DVDD
VCC1: C17.1 C18.1 C19.1 D6.C D7.C IC5.10 IC5.16 IC6.10 IC6.16 JP13.2 JP15.1 JP20.1 JP22.2 JP22.19 JP23.3 JP24.1 JP25.1 JP26.1 R31.2 R32.1 R33.1 R34.1 R35.1 R37.2 R44.1 R45.2 R46.2 U3.5 U3.17 U3.27 U3.38 U4.AVDD U4.DVDD
VCC2: C28.1 C29.1 C30.1 D10.C D11.C IC8.10 IC8.16 IC9.10 IC9.16 JP27.2 JP28.1 JP33.1 JP35.2 JP35.19 JP36.3 JP37.1 JP38.1 JP39.1 R61.2 R62.1 R63.1 R64.1 R65.1 R67.2 R74.1 R75.2 R76.2 U5.5 U5.17 U5.27 U5.38 U6.AVDD U6.DVDD
VCC3: C39.1 C40.1 C41.1 D14.C D15.C IC11.10 IC11.16 IC12.10 IC12.16 JP40.2 JP41.1 JP46.1 JP48.2 JP48.19 JP49.3 JP50.1 JP51.1 JP52.1 R91.2 R92.1 R93.1 R94.1 R95.1 R97.2 R104.1 R105.2 R106.2 U7.5 U7.17 U7.27 U7.38 U8.AVDD U8.DVDD
VOUT_CONTRAST: JP12.3 JP12.18
VOUT_CONTRAST1: JP22.3 JP22.18
VOUT_CONTRAST2: JP35.3 JP35.18
VOUT_CONTRAST3: JP48.3 JP48.18
VREF: C7.1 JP4.1 R1.1 U2.VREF
VREF1: C20.1 JP17.1 R31.1 U4.VREF
VREF2: C31.1 JP30.1 R61.1 U6.VREF
VREF3: C42.1 JP43.1 R91.1 U8.VREF
XTAL1: C1.1 Q1.2 U1.8
XTAL2: C2.1 Q1.1 U1.7
XTAL3: C12.1 Q2.2 U3.8
XTAL4: C15.1 Q2.1 U3.7
XTAL5: C23.1 Q3.2 U5.8
XTAL6: C26.1 Q3.1 U5.7
XTAL7: C34.1 Q4.2 U7.8
XTAL8: C37.1 Q4.1 U7.7